# Altium PCB PCB_robotdog_2022-01-15.pcbdoc
Units mm, origin at the board's own origin, x right, y up, seen from the top; angles counter-clockwise.
Board outline 86.23 x 86.49 mm, 2 copper layers (Top Layer, Bottom Layer); 17 components, 30 nets, 101 pads, 0 vias.
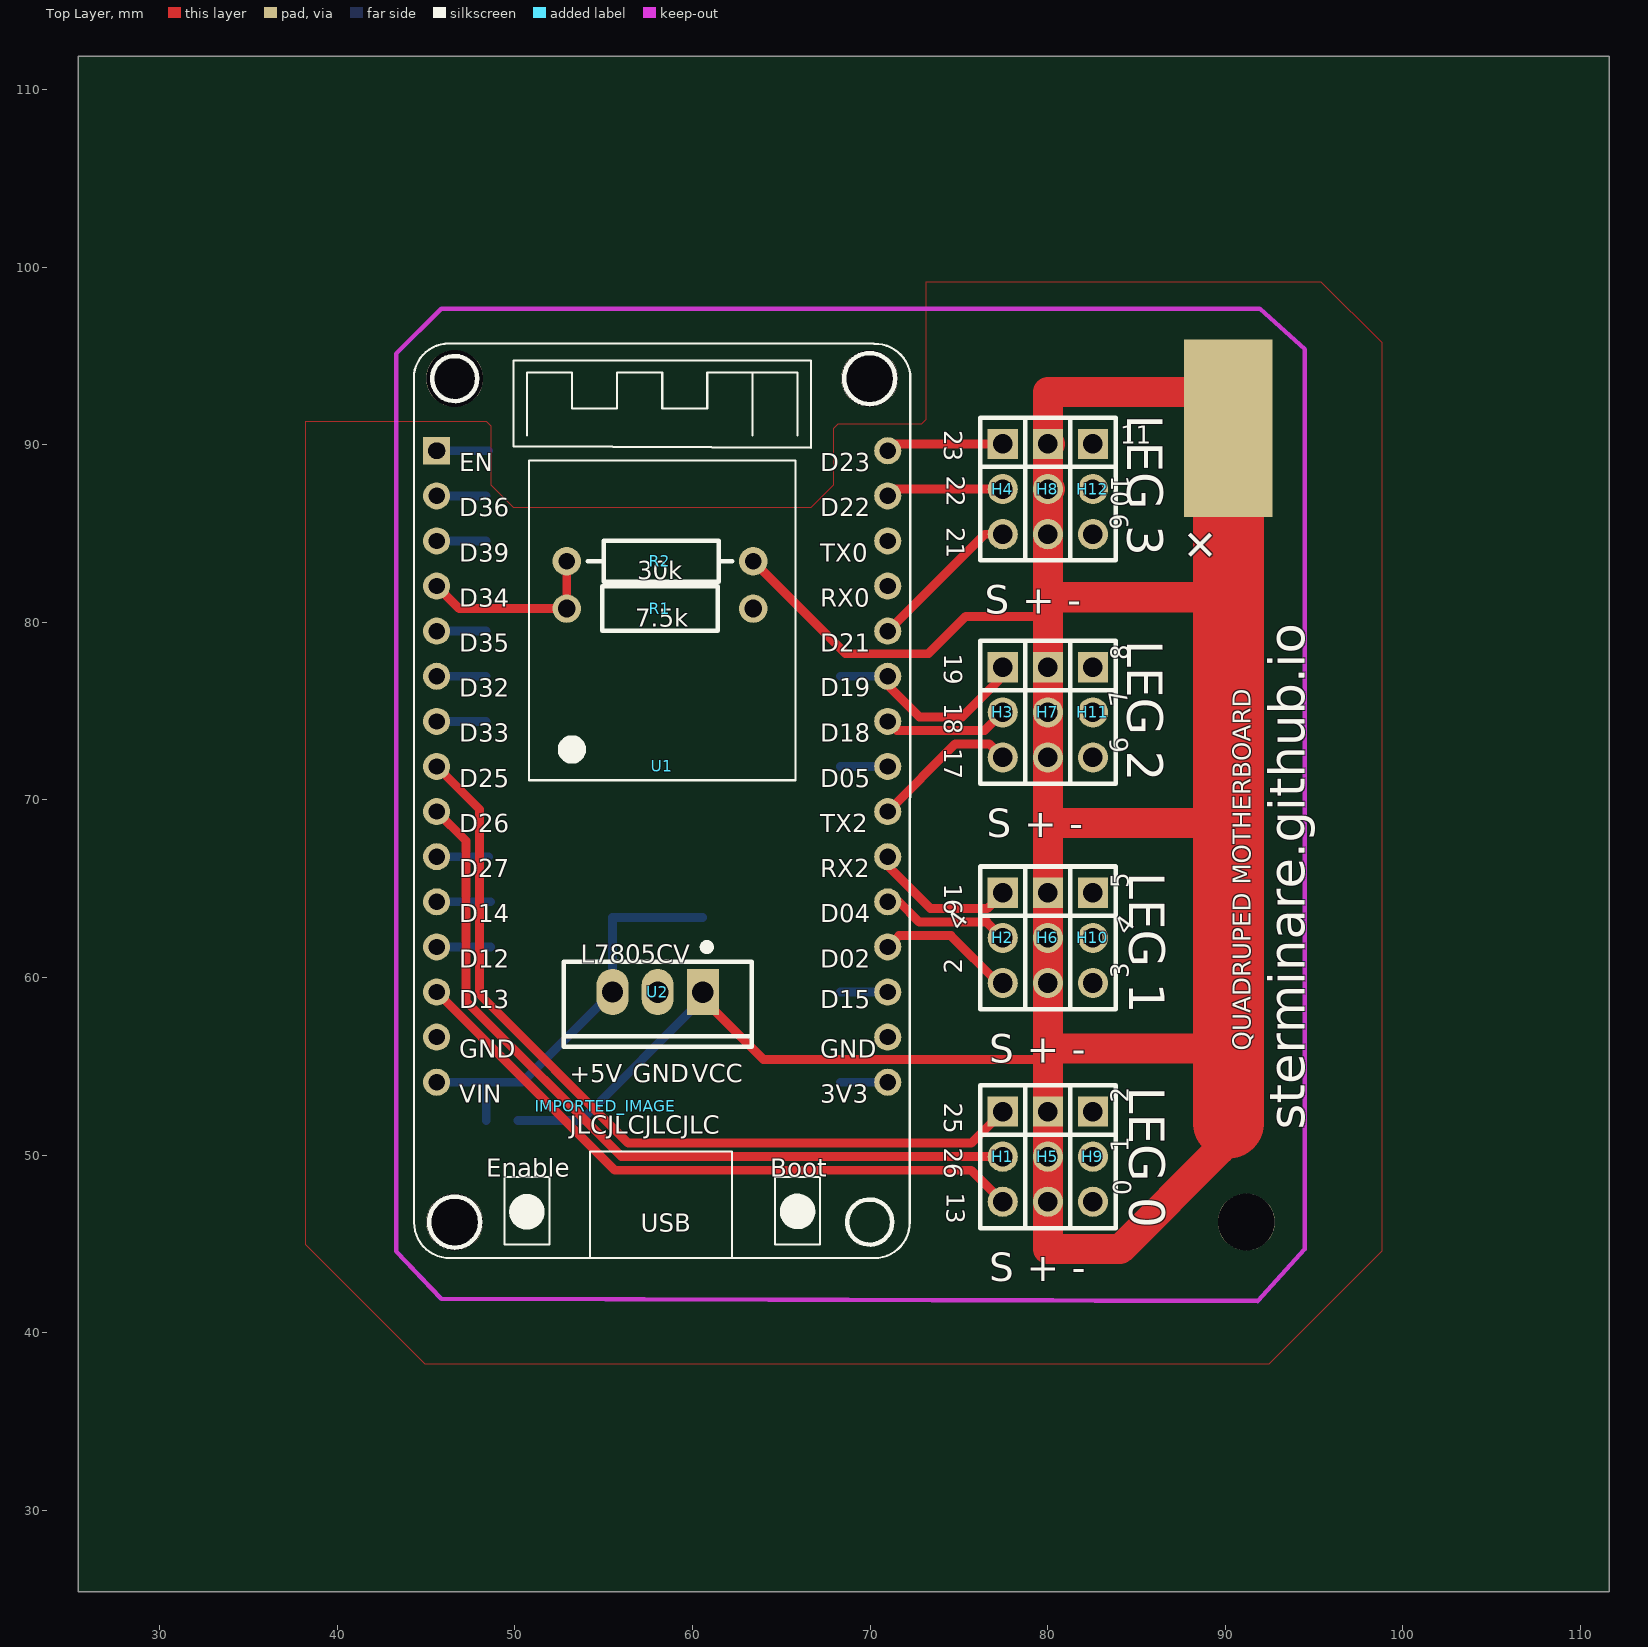
[diagram p0: Top Layer view]
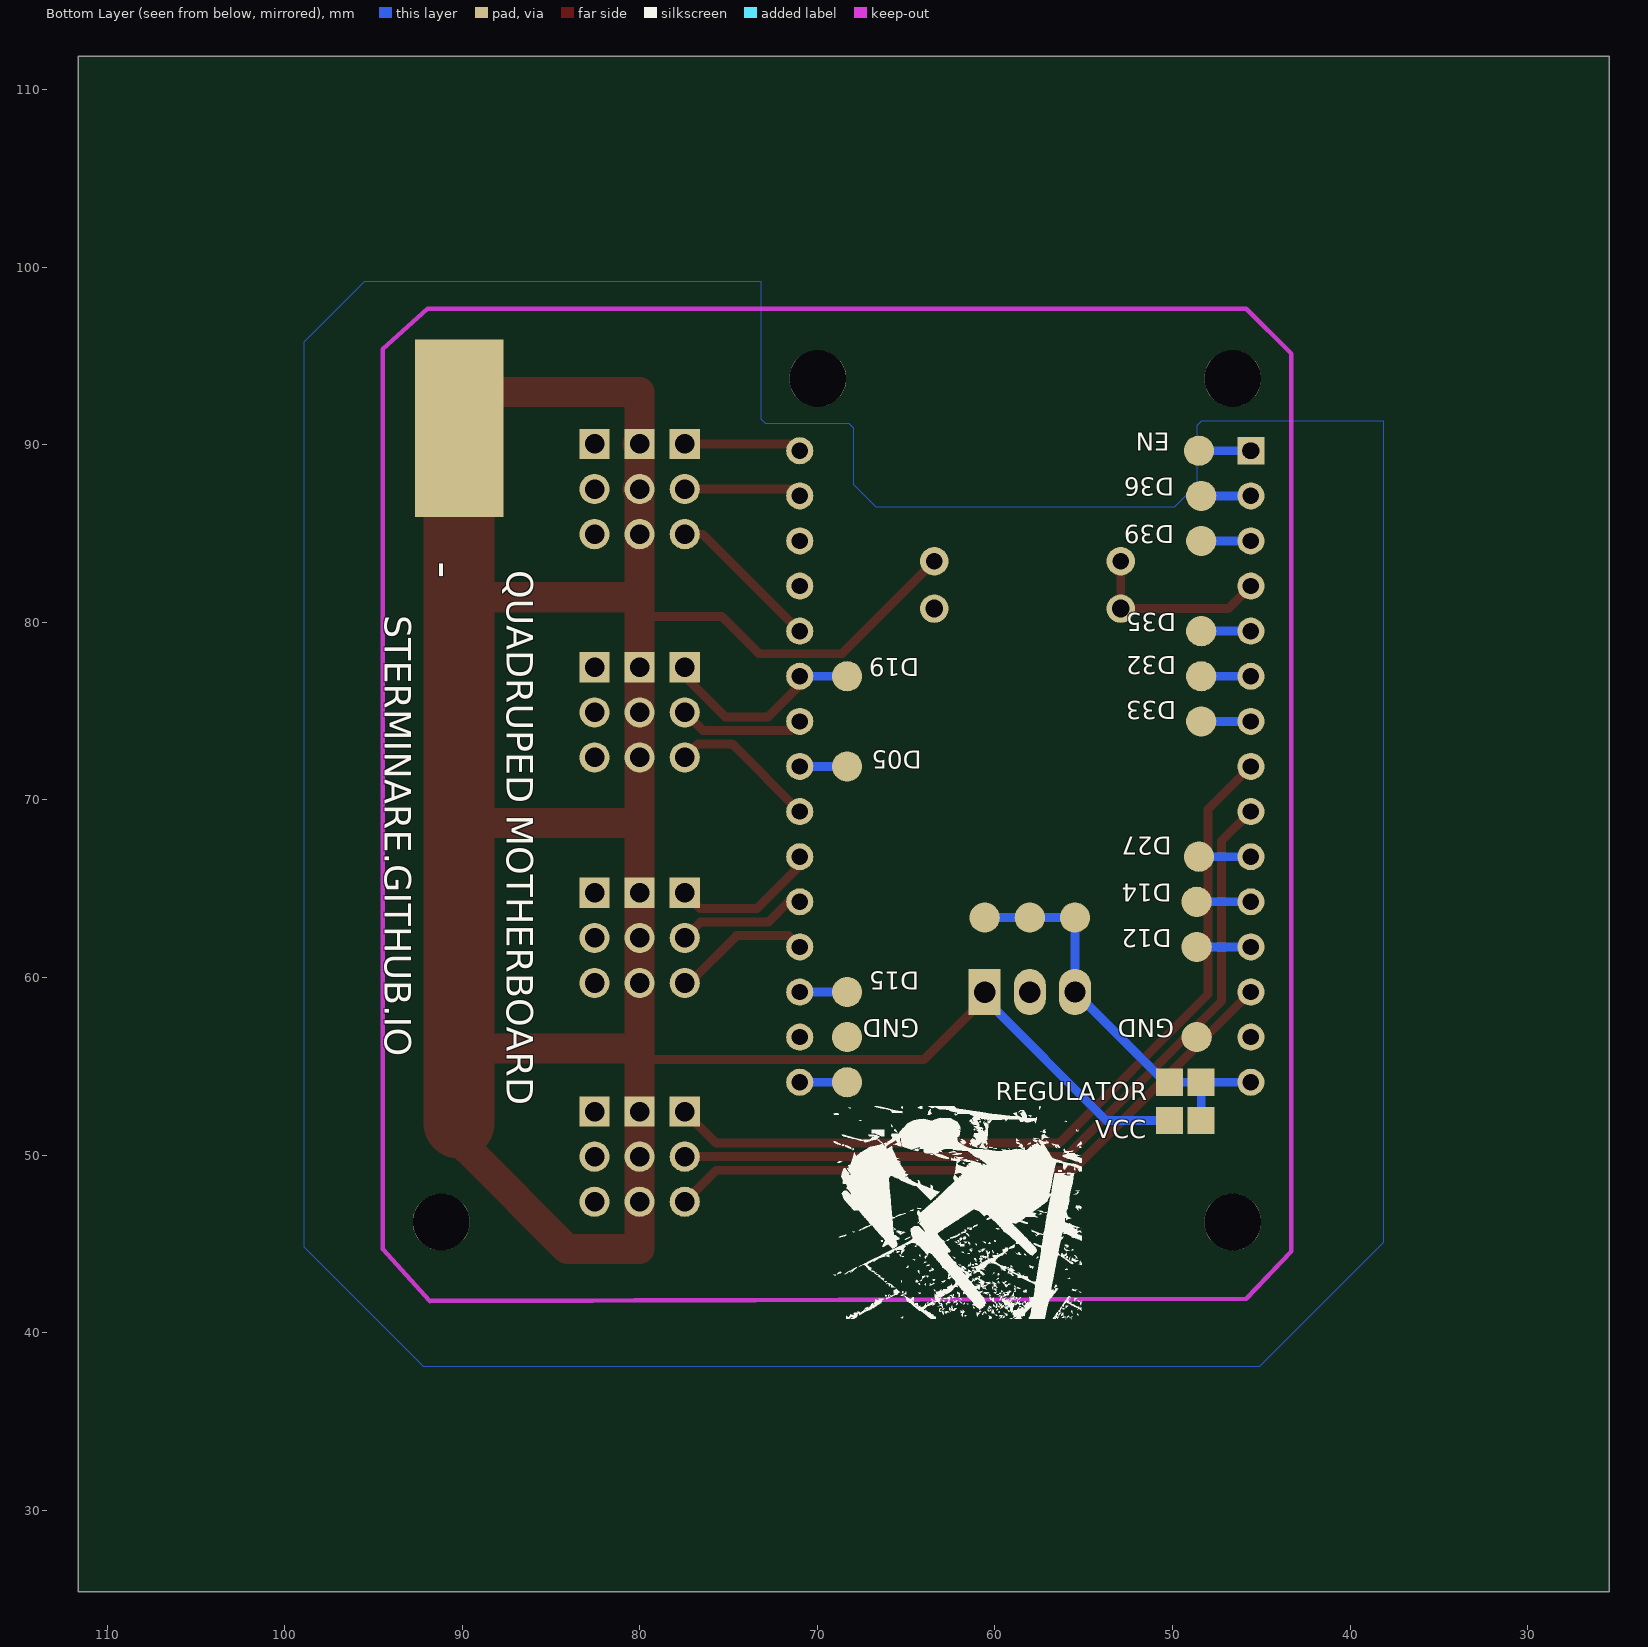
[diagram p1: Bottom Layer view, seen from below]

## Layer stack, top to bottom
Top Layer: signal copper (thickness not stored)
Dielectric: dielectric 0.32, FR-4, Dk 4.8
Bottom Layer: signal copper (thickness not stored)

## Board outline
111.633,25.4 25.4,25.4 25.4,111.887 111.633,111.887

## Components (designator, comment, footprint, x,y, rotation, side; value= is the part's Value field where it differs from the comment)
H1 "leg0 signal header" HDR-TH_3P-P2.54-V-M 77.47,49.911 r270 top
H2 "leg1 signal header" HDR-TH_3P-P2.54-V-M 77.47,62.23 r270 top
H3 "leg2 signal header" HDR-TH_3P-P2.54-V-M 77.47,74.93 r270 top
H4 "leg3 signal header" HDR-TH_3P-P2.54-V-M 77.47,87.503 r270 top
H5 "leg0 vcc header" HDR-TH_3P-P2.54-V-M 80.01,49.911 r270 top
H6 "leg1 vcc header" HDR-TH_3P-P2.54-V-M 80.01,62.23 r270 top
H7 "leg2 vcc header" HDR-TH_3P-P2.54-V-M 80.01,74.93 r270 top
H8 "leg3 vcc header" HDR-TH_3P-P2.54-V-M 80.01,87.503 r270 top
H9 "leg0 ground header" HDR-TH_3P-P2.54-V-M 82.55,49.911 r270 top
H10 "leg1 ground header" HDR-TH_3P-P2.54-V-M 82.55,62.23 r270 top
H11 "leg2 ground header" HDR-TH_3P-P2.54-V-M 82.55,74.93 r270 top
H12 "leg3 ground header" HDR-TH_3P-P2.54-V-M 82.55,87.503 r270 top
IMPORTED_IMAGE "IMPORTED_IMAGE" IMPORTED_IMAGE 55.109,52.752 r0 top
R1 "7.5K" RES-TH_BD2.5-L6.5-P10.50-D0.6 58.166,80.772 r180 top
R2 "30K" RES-TH_BD2.2-L6.5-P10.50-D0.6 58.166,83.439 r0 top
U1 "ESP32 DEVKIT V1 DOIT" DOIT-ESP32-DEVKIT-V1 45.593,89.662 r0 top
U2 "5V regulator" TO-220-3_L10.0-W4.5-P2.54-L 58.039,59.182 r180 top

## Footprints (in the part's own frame and the unit in brackets; to place one, negate y for a bottom-side part, rotate by r counter-clockwise, add the part's x,y. Pads: shape width x height; smd on the part's side, far side on the other; paste and mask are expansions set on the pad)
DOIT-ESP32-DEVKIT-V1 [mil]
  rect 60x60 hole 36 slot 37.8 at 0 deg: 1(-0.01,0.01)
  round 60 hole 36: 2(-0.01,-99.99) 3(-0.01,-199.99) 4(-0.01,-299.99) 5(-0.01,-399.99) 6(-0.01,-499.99) 7(-0.01,-599.99) 8(-0.01,-699.99) 9(-0.01,-799.99) 10(-0.01,-899.99) 11(-0.01,-999.99) 12(-0.01,-1099.99) 13(-0.01,-1199.99) 14(-0.01,-1299.99) 15(-0.01,-1399.99) 16(999.99,0.01) 17(999.99,-99.99) 18(999.99,-199.99) 19(999.99,-299.99) 20(999.99,-399.99) 21(999.99,-499.99) 22(999.99,-599.99) 23(999.99,-699.99) 24(999.99,-799.99) 25(999.99,-899.99) 26(999.99,-999.99) 27(999.99,-1099.99) 28(999.99,-1199.99) 29(999.99,-1299.99) 30(999.99,-1399.99)
  silkscreen extent -50,-1790 1050,238
HDR-TH_3P-P2.54-V-M [mm]
  rect 1.7x1.7 hole 1.1: 1(-2.54,0)
  round 1.7 hole 1.1: 2(0,0) 3(2.54,0)
  silkscreen extent -4.02,-1.27 4.02,1.27
IMPORTED_IMAGE [mm]
RES-TH_BD2.2-L6.5-P10.50-D0.6 [mm]
  round 1.6 hole 0.914: 1(-5.25,0) 2(5.25,0)
  silkscreen extent -4.06,-1.14 4.06,1.14
RES-TH_BD2.5-L6.5-P10.50-D0.6 [mm]
  round 1.6 hole 1: 1(-5.25,0) 2(5.25,0)
  silkscreen extent -3.25,-1.25 3.25,1.25
TO-220-3_L10.0-W4.5-P2.54-L [mm]
  rect 1.8x2.6 hole 1.2: 1(-2.54,0.005)
  oval 1.8x2.6 hole 1.2: 2(0,0.005) 3(2.54,-0.005)
  silkscreen extent -5.3,-2.73 5.3,3.09

## Free pads (board coordinates)
  rect 5x10 smd far side: 1(90.17,90.932)
  rect 5x10 smd: 1(90.17,90.932)
  rect 1.524x1.524 smd far side: 20(48.387,51.943) 20(48.387,54.102) 20(50.165,51.943) 20(50.165,54.102)
  round 1.7 smd far side: D19(48.387,74.422) D19(48.387,76.962) D19(48.387,79.502) D19(48.387,84.582) D19(48.387,87.122) D19(48.514,66.802) D19(48.514,89.662) D19(48.641,56.642) D19(48.641,61.722) D19(48.641,64.262) D19(55.499,63.373) D19(58.039,63.373) D19(60.579,63.373) D19(68.326,54.102) D19(68.326,56.642) D19(68.326,59.182) D19(68.326,71.882) D19(68.326,76.962)
  round 3.2 hole 3.2 unplated: ""(46.609,46.228) ""(46.609,93.726) ""(69.977,93.726) ""(91.186,46.228)

## Nets (pads, with @x,y where several pads share a name; then routed paths per layer and width w, separated by ;. In a path a pad name is that pad's centre, name@x,y a point inside that pad or via, vN(x,y) a via of type N, cw(c..) or ccw(c..) an arc to the next point about the centre after c; other vN are vias at no path point)
3V: pad.D19@68.326,54.102 U1.30 | length 2.7
  Bottom Layer w0.5: pad.D19@68.326,54.102 U1.30
+5V: pad.20@48.387,51.943 pad.20@48.387,54.102 pad.20@50.165,54.102 pad.D19@55.499,63.373 pad.D19@58.039,63.373 pad.D19@60.579,63.373 U1.15 U2.3 | length 23.4
  Bottom Layer w0.5: U1.15 pad.20@48.387,54.102 ; pad.20@48.387,51.943 pad.20@48.387,54.102 ; pad.D19@60.579,63.373 58.039,63.373 55.499,63.373 U2.3 50.414,54.102 50.165,54.102 pad.20@48.387,54.102
D1: U1.18
D2: H2.3 U1.27 | length 7.8
  Top Layer w0.5: U1.27 71.628,62.357 74.549,62.357 77.216,59.69 H2.3
D3: U1.19
D4: H2.2 U1.26 | length 7.3
  Top Layer w0.5: U1.26 71.628,64.262 72.771,63.119 76.581,63.119 H2.2
D5: pad.D19@68.326,71.882 U1.23 | length 2.7
  Bottom Layer w0.5: pad.D19@68.326,71.882 U1.23
D12: pad.D19@48.641,61.722 U1.12 | length 2.7
  Bottom Layer w0.5: U1.12@45.974,61.722 pad.D19@48.641,61.722
D13: H1.3 U1.13 | length 36.8
  Top Layer w0.5: U1.13 50.619,54.156 55.626,49.149 75.692,49.149 H1.3
D14: pad.D19@48.641,64.262 U1.11 | length 2.7
  Bottom Layer w0.5: U1.11@45.974,64.262 pad.D19@48.641,64.262
D15: pad.D19@68.326,59.182 U1.28 | length 2.7
  Bottom Layer w0.5: pad.D19@68.326,59.182 U1.28
D16: H2.1 U1.25 | length 8.4
  Top Layer w0.5: U1.25 70.993,66.294 73.406,63.881 76.586,63.881 H2.1
D17: H3.3 U1.24 | length 8.4
  Top Layer w0.5: U1.24 74.803,73.152 76.708,73.152 H3.3
D18: H3.2 U1.22 | length 7.1
  Top Layer w0.5: U1.22 71.501,73.914 76.454,73.914 H3.2
D19: H3.1 pad.D19@68.326,76.962 U1.21 | length 11.8
  Top Layer w0.5: U1.21 70.993,76.454 72.771,74.676 75.184,74.676 77.47,76.962 H3.1
  Bottom Layer w0.5: pad.D19@68.326,76.962 U1.21
D21: H4.3 U1.20 | length 8.7
  Top Layer w0.5: U1.20 76.454,84.963 H4.3
D22: H4.2 U1.17 | length 6.6
  Top Layer w0.5: U1.17 71.374,87.503 H4.2
D23: H4.1 U1.16 | length 6.6
  Top Layer w0.5: U1.16 71.374,90.043 H4.1
D25: H1.1 U1.8 | length 47.5
  Top Layer w0.5: U1.8 48.006,69.469 48.006,59.055 56.388,50.673 75.692,50.673 H1.1
D26: H1.2 U1.9 | length 45.2
  Top Layer w0.5: U1.9 47.244,67.691 47.244,58.674 56.007,49.911 H1.2
D27: pad.D19@48.514,66.802 U1.10 | length 2.7
  Bottom Layer w0.5: U1.10@45.847,66.802 pad.D19@48.514,66.802
D32: pad.D19@48.387,76.962 U1.6 | length 2.7
  Bottom Layer w0.5: U1.6@45.72,76.962 pad.D19@48.387,76.962
D33: pad.D19@48.387,74.422 U1.7 | length 2.7
  Bottom Layer w0.5: U1.7@45.72,74.422 pad.D19@48.387,74.422
D34: R1.2 R2.1 U1.4 | length 10.5
  Top Layer w0.5: U1.4 46.863,80.772 R1.2 R2.1
D35: pad.D19@48.387,79.502 U1.5 | length 2.7
  Bottom Layer w0.5: U1.5@45.72,79.502 pad.D19@48.387,79.502
D36: pad.D19@48.387,87.122 U1.2 | length 2.7
  Bottom Layer w0.5: U1.2@45.72,87.122 pad.D19@48.387,87.122
D39: pad.D19@48.387,84.582 U1.3 | length 2.7
  Bottom Layer w0.5: U1.3@45.72,84.582 pad.D19@48.387,84.582
EN: pad.D19@48.514,89.662 U1.1 | length 2.7
  Bottom Layer w0.5: U1.1@45.847,89.662 pad.D19@48.514,89.662
GND: H9.1 H9.2 H9.3 H10.1 H10.2 H10.3 H11.1 H11.2 H11.3 H12.1 H12.2 H12.3 pad.1@90.17,90.932 pad.D19@48.641,56.642 pad.D19@68.326,56.642 R1.1 U1.14 U1.29 U2.2
VCC: H5.1 H5.2 H5.3 H6.1 H6.2 H6.3 H7.1 H7.2 H7.3 H8.1 H8.2 H8.3 pad.1@90.17,90.932 pad.20@50.165,51.943 R2.2 U2.1 | length 201.5
  Top Layer w0.5: U2.1 60.579,58.801 64.008,55.372 80.01,55.372 80.01,56.007 ; R2.2 68.623,78.232 73.279,78.232 75.385,80.338 80.01,80.338
  Top Layer w1: H8.3 80.01,87.376 H8.2@80.137,87.503
  Top Layer w1.7: 80.01,69.617 H6.1 H6.2 H6.3 80.01,56.007 ; H8.2 80.01,89.916 H8.1@80.137,90.043 ; H8.1 80.01,92.964 88.138,92.964 pad.1@90.17,90.932 ; 80.137,81.407 80.01,81.28 H7.1 H7.2 H7.3 80.01,68.707 90.17,68.707 ; H8.2@80.137,87.503 80.01,87.376 H8.3 80.01,81.407 90.17,81.407 90.17,82.296 ; 89.662,51.308 89.662,50.292 84.074,44.704 80.01,44.704 H5.3 H5.2 H5.1 80.01,56.007 ; 90.17,56.007 80.01,56.007
  Top Layer w4: 90.17,51.816 pad.1@90.17,90.932
  Bottom Layer w0.5: pad.20@50.165,51.943 53.721,51.943 60.579,58.801 U2.1

## Polygon pours and split planes (outlines as drawn)
GND on Bottom Layer (solid): 45.085,38.1 38.1,45.085 38.1,91.313 39.878,91.313 48.387,91.313 48.641,91.059 48.641,87.757 49.911,86.487 66.675,86.487 67.945,87.757 67.945,90.932 68.199,91.186 72.898,91.186 73.152,91.44 73.152,99.187 95.504,99.187 98.933,95.758 98.933,44.831 92.202,38.1 45.085,38.1
GND on Top Layer (solid): 38.227,91.313 39.878,91.313 48.387,91.313 48.641,91.059 48.641,87.757 49.911,86.487 66.675,86.487 67.945,87.757 67.945,90.932 68.199,91.186 72.898,91.186 73.152,91.44 73.152,99.187 95.377,99.187 98.806,95.758 98.806,44.577 92.456,38.227 44.958,38.227 38.227,44.958 38.227,91.313

## Silkscreen, mask and mechanical layers (free items; w line width, h text height)
Top Overlay:
  text "LEG 3" at 84.471,91.694 h2 r270
  text "23" at 74.176,90.805 h1 r270
  text "11" at 84.074,90.051 h1
  text "22" at 74.303,88.265 h1 r270
  text "10" at 83.574,88.265 h1 r270
  text "21" at 74.303,85.344 h1 r270
  text "9" at 84.572,85.261 h1 r95
  text "+" at 89.988,84.146 h2 r135
  text "30k" at 56.896,82.431 h1
  text "S + -" at 76.454,80.48 h1.6
  text "7.5k" at 56.769,79.764 h1
  text "LEG 2" at 84.471,78.994 h2 r270
  text "19" at 74.176,78.232 h1 r270
  text "8" at 84.574,77.851 h1 r90
  text "18" at 74.176,75.438 h1 r270
  text "7" at 84.565,75.406 h1 r101
  text "17" at 74.176,72.898 h1 r270
  text "6" at 84.572,72.688 h1 r95
  text "S + -" at 76.581,67.907 h1.6
  text "LEG 1" at 84.598,65.913 h2 r270
  text "16" at 74.176,65.278 h1 r270
  text "5" at 84.574,65.024 h1 r90
  text "4" at 75.081,62.571 h1 r54
  text "4" at 84.479,62.317 h1 r54
  text "L7805CV" at 53.721,60.841 h1
  text "2" at 75.176,60.198 h1 r90
  text "3" at 84.574,59.944 h1 r90
  text "QUADRUPED MOTHERBOARD" at 91.432,55.88 h1 r90
  text "S + -" at 76.708,55.207 h1.6
  text "+5V" at 53.086,54.11 h1
  text "GND" at 56.642,54.11 h1
  text "VCC" at 59.944,54.11 h1
  text "LEG 0" at 84.598,53.848 h2 r270
  text "25" at 74.176,52.959 h1 r270
  text "2" at 84.574,52.959 h1 r90
  text "sterminare.github.io" at 94.488,51.435 h2.03 r90
  text "JLCJLCJLCJLC" at 53.086,51.189 h1
  text "26" at 74.176,50.419 h1 r270
  text "1" at 84.574,50.165 h1 r90
  text "13" at 74.303,47.879 h1 r270
  text "0" at 84.701,47.752 h1 r90
  text "S + -" at 76.708,42.888 h1.6
Bottom Overlay:
  text "EN" at 50.165,90.67 h1 r180
  text "D36" at 49.911,88.13 h1 r180
  text "D39" at 49.911,85.463 h1 r180
  text "-" at 91.932,83.439 h2 r90
  text "QUADRUPED MOTHERBOARD" at 87.491,82.931 h1.5 r90
  text "D35" at 49.784,80.51 h1 r180
  text "STERMINARE.GITHUB.IO" at 94.349,80.391 h1.5 r90
  text "D32" at 49.784,78.097 h1 r180
  text "D19" at 64.262,77.97 h1 r180
  text "D33" at 49.784,75.557 h1 r180
  text "D05" at 64.135,72.763 h1 r180
  text "D27" at 50.038,67.937 h1 r180
  text "D14" at 50.038,65.27 h1 r180
  text "D12" at 50.038,62.73 h1 r180
  text "D15" at 64.262,60.317 h1 r180
  text "GND" at 49.911,57.65 h1 r180
  text "GND" at 64.262,57.65 h1 r180
  text "REGULATOR" at 59.944,53.094 h1
  text "VCC" at 54.356,50.935 h1

## Text inside footprints (layer, text, board x,y; h text height)
U1: Top Overlay "Enable" at 48.387,48.776 h1; Top Overlay "Boot" at 64.389,48.776 h1; Top Overlay "USB" at 57.093,45.672 h1; Top Overlay "EN" at 46.863,88.502 h1; Top Overlay "D36" at 46.863,85.962 h1; Top Overlay "D39" at 46.863,83.422 h1; Top Overlay "D34" at 46.863,80.882 h1; Top Overlay "D35" at 46.863,78.342 h1; Top Overlay "D32" at 46.863,75.802 h1; Top Overlay "D33" at 46.863,73.262 h1; Top Overlay "D13" at 46.863,58.276 h1; Top Overlay "D12" at 46.863,60.562 h1; Top Overlay "D14" at 46.863,63.102 h1; Top Overlay "D27" at 46.863,65.642 h1; Top Overlay "D26" at 46.863,68.182 h1; Top Overlay "D25" at 46.863,70.722 h1; Top Overlay "D05" at 67.183,70.722 h1; Top Overlay "TX2" at 67.183,68.182 h1; Top Overlay "RX2" at 67.183,65.642 h1; Top Overlay "D04" at 67.183,63.102 h1; Top Overlay "D02" at 67.183,60.562 h1; Top Overlay "D15" at 67.183,58.276 h1; Top Overlay "D18" at 67.183,73.262 h1; Top Overlay "D19" at 67.183,75.827 h1; Top Overlay "D21" at 67.183,78.342 h1; Top Overlay "RX0" at 67.183,80.882 h1; Top Overlay "TX0" at 67.183,83.422 h1; Top Overlay "D22" at 67.183,85.962 h1; Top Overlay "D23" at 67.183,88.502 h1; Top Overlay "GND" at 67.183,55.482 h1; Top Overlay "3V3" at 67.183,52.942 h1; Top Overlay "VIN" at 46.863,52.942 h1; Top Overlay "GND" at 46.863,55.482 h1